# Altium PCB Mickeyboard2.PcbDoc
Units mil, origin at the board's own origin, x right, y up, seen from the top; angles counter-clockwise.
Board outline 7195 x 6185 mil, 2 copper layers (Top Layer, Bottom Layer); 103 components, 146 nets, 1044 pads, 0 vias.
Unrouted connection lines stored in the file: 263.
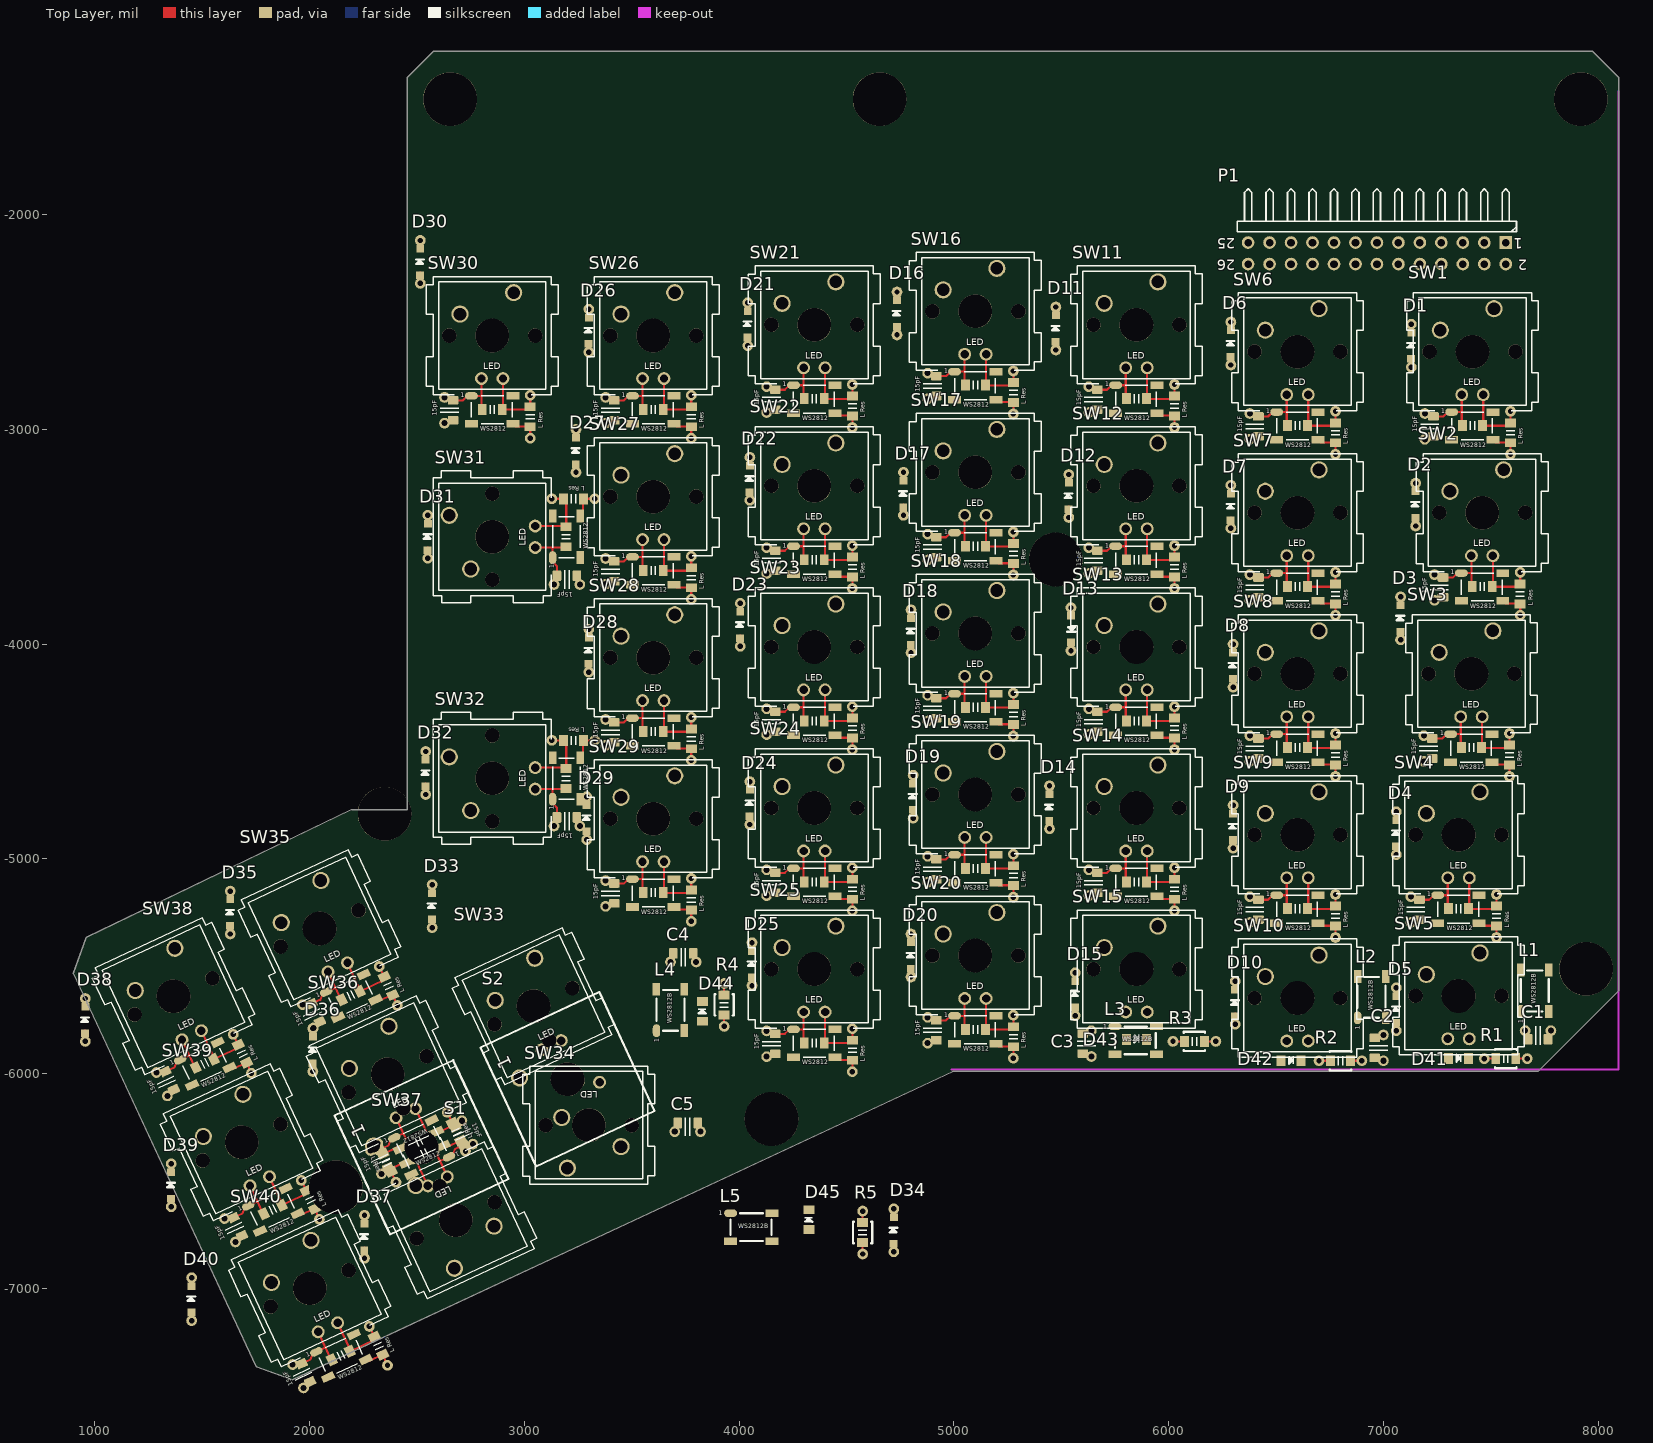
[diagram p0: Top Layer view]
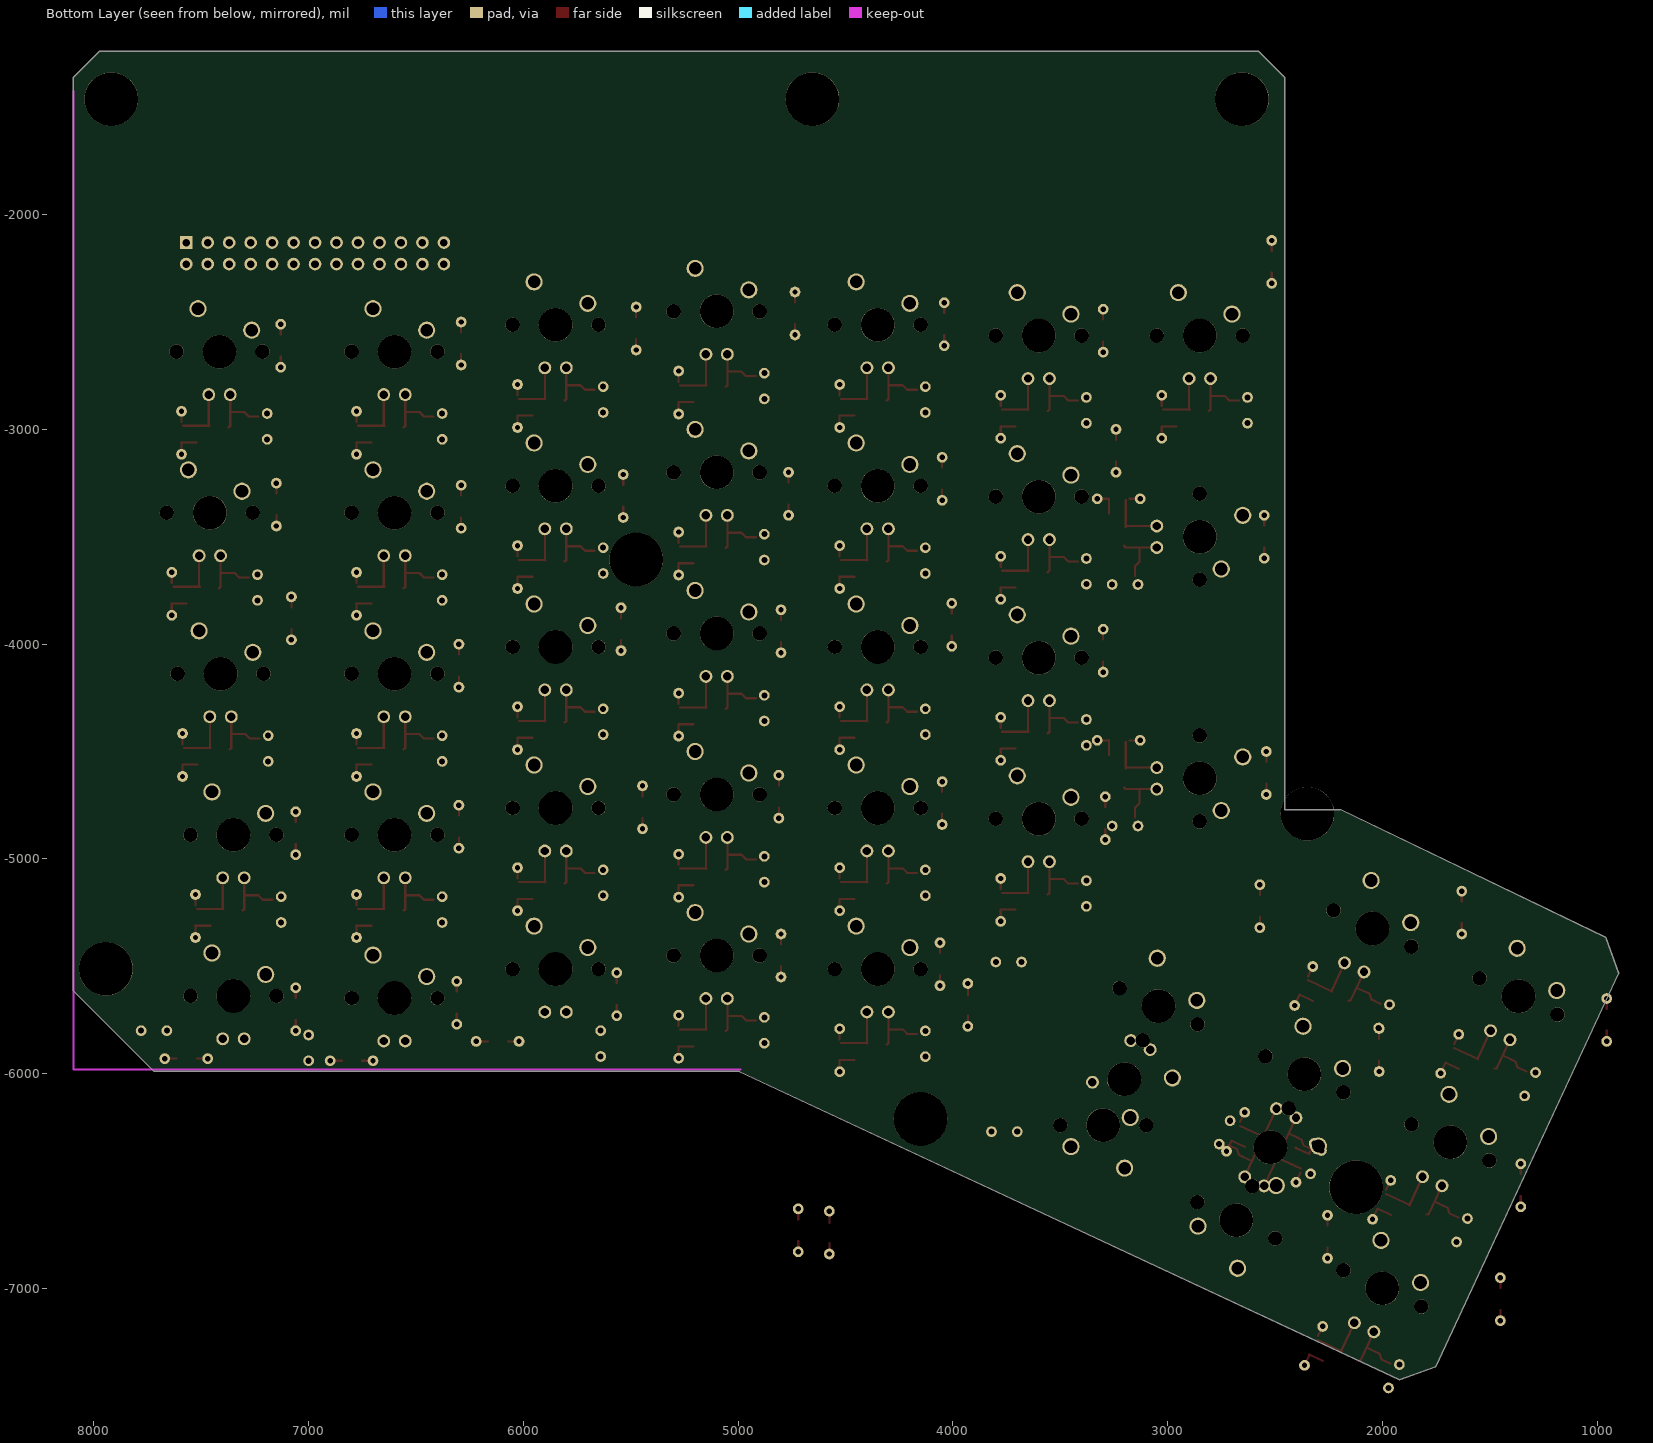
[diagram p1: Bottom Layer view, seen from below]

## Layer stack, top to bottom
Top Solder: solder mask 0.4, Solder Resist, Dk 3.5
Top Layer: signal copper 1.4
Dielectric 1: dielectric 12.6, FR-4, Dk 4.8
Bottom Layer: signal copper 1.4
Bottom Solder: solder mask 0.4, Solder Resist, Dk 3.5

## Board outline
2455,-4650 2455,-4770 2195,-4770 960,-5365 900,-5534.07 1751.52,-7365 1920,-7425 4995,-5990 7720,-5990 8095,-5615 8095,-1360 7975,-1240 2575,-1240 2455,-1360

## Design rules (kind name [scope] priority, off if disabled: settings)
Clearance [All] p1: gap=8
HoleSize [All] p1: absolutevalues=TRUE maxlimit=100 minlimit=15 maxpercent=80.000 minpercent=20.000
PolygonConnect [All] p1: connectstyle=Relief reliefconductorwidth=10 reliefentries=4 polygonreliefangle="90 Angle" airgapwidth=10
RoomDefinition keyboard [InComponentClass('keyboard')] p1: confinementstyle=ConfineIn formatcopy=TRUE lockcomponents=FALSE outline 8815,-3970 18900,-3970 18900,-1695 8815,-1695
RoutingVias [All] p1 off: holewidth=15 width=20 viastyle="Through Hole" minholewidth=12 minwidth=18 maxholewidth=250 maxwidth=250
ShortCircuit ShortCircuit_2 [(InNet('GND') OR InNet('VCC'))] p1: allowed=TRUE
ShortCircuit [InNet('No Net') vs OnLayer('Top Layer')] p2: allowed=TRUE
ShortCircuit ShortCircuit_1 [All] p3: allowed=FALSE
SolderMaskExpansion [All] p1: expansion=4
Width [All] p1: maxlimit=20 minlimit=8 preferedwidth=8
28 further rules are at their usual default settings.

## Components (designator, comment, footprint, x,y, rotation, side; value= is the part's Value field where it differs from the comment)
C1 "Cap" AxialSMDCap 7780,-5800 r180 top
C2 "Cap" AxialSMDCap 7000,-5940 r90 top
C3 "Cap" AxialSMDCap 5640,-5920 r90 top
C4 "Cap" AxialSMDCap 3680,-5480 r0 top
C5 "Cap" AxialSMDCap 3700,-6270 r0 top
D1 "Diode" AxialSMDDiode 7130,-2710 r90 top
D2 "Diode" AxialSMDDiode 7150,-3450 r90 top
D3 "Diode" AxialSMDDiode 7080,-3980 r90 top
D4 "Diode" AxialSMDDiode 7060,-4980 r90 top
D5 "Diode" AxialSMDDiode 7060,-5800 r90 top
D6 "Diode" AxialSMDDiode 6290,-2700 r90 top
D7 "Diode" AxialSMDDiode 6290,-3460 r90 top
D8 "Diode" AxialSMDDiode 6300,-4200 r90 top
D9 "Diode" AxialSMDDiode 6300,-4950 r90 top
D10 "Diode" AxialSMDDiode 6310,-5770 r90 top
D11 "Diode" AxialSMDDiode 5475,-2630 r90 top
D12 "Diode" AxialSMDDiode 5535,-3410 r90 top
D13 "Diode" AxialSMDDiode 5545,-3830 r270 top
D14 "Diode" AxialSMDDiode 5445,-4860 r90 top
D15 "Diode" AxialSMDDiode 5565,-5730 r90 top
D16 "Diode" AxialSMDDiode 4735,-2560 r90 top
D17 "Diode" AxialSMDDiode 4765,-3400 r90 top
D18 "Diode" AxialSMDDiode 4800,-4040 r90 top
D19 "Diode" AxialSMDDiode 4810,-4810 r90 top
D20 "Diode" AxialSMDDiode 4800,-5550 r90 top
D21 "Diode" AxialSMDDiode 4040,-2610 r90 top
D22 "Diode" AxialSMDDiode 4050,-3330 r90 top
D23 "Diode" AxialSMDDiode 4005,-4010 r90 top
D24 "Diode" AxialSMDDiode 4050,-4840 r90 top
D25 "Diode" AxialSMDDiode 4060,-5590 r90 top
D26 "Diode" AxialSMDDiode 3300,-2640 r90 top
D27 "Diode" AxialSMDDiode 3240,-3200 r90 top
D28 "Diode" AxialSMDDiode 3300,-4130 r90 top
D29 "Diode" AxialSMDDiode 3290,-4910 r90 top
D30 "Diode" AxialSMDDiode 2515,-2320 r90 top
D31 "Diode" AxialSMDDiode 2550,-3600 r90 top
D32 "Diode" AxialSMDDiode 2540,-4700 r90 top
D33 "Diode" AxialSMDDiode 2570,-5320 r90 top
D34 "Diode" AxialSMDDiode 4720,-6830 r90 top
D35 "Diode" AxialSMDDiode 1630,-5350 r90 top
D36 "Diode" AxialSMDDiode 2015,-5990 r90 top
D37 "Diode" AxialSMDDiode 2255,-6860 r90 top
D38 "Diode" AxialSMDDiode 955,-5850 r90 top
D39 "Diode" AxialSMDDiode 1355,-6620 r90 top
D40 "Diode" AxialSMDDiode 1450,-7150 r90 top
D41 "LED2" 0805_LED 7350,-5930 r0 top
D42 "LED2" 0805_LED 6570,-5940 r0 top
D43 "LED2" 0805_LED 5850,-5840 r0 top
D44 "LED2" 0805_LED 3830,-5710 r90 top
D45 "LED2" 0805_LED 4325,-6680 r90 top
L1 "WS2812B" WS2812 7640,-5710 r90 top
L2 "WS2812B" WS2812 6880,-5740 r90 top
L3 "WS2812B" WS2812 5750,-5780 r0 top
L4 "WS2812B" WS2812 3615,-5800 r90 top
L5 "WS2812B" WS2812 3960,-6650 r0 top
P1 "Header 13X2H" HDR2X13H 7570,-2130 r180 top
R1 "Res1" AxialSMDResistor 7470,-5930 r0 top
R2 "Res1" AxialSMDResistor 6700,-5940 r0 top
R3 "Res1" AxialSMDResistor 6020,-5850 r0 top
R4 "Res1" AxialSMDResistor 3930,-5780 r90 top
R5 "Res1" AxialSMDResistor 4575,-6840 r90 top
S1 "SW-SPST" CHERRYMXSWITCHNOLED 2521,-6343 r115 top
S2 "SW-SPST" CHERRYMXSWITCHNOLED 3201,-6026 r115 top
SW1 "CherrySwitch_WS" CHERRYMXSWITCHLED_WS2812 7415,-2638 r0 top
SW2 "CherrySwitch_WS" CHERRYMXSWITCHLED_WS2812 7460,-3388 r0 top
SW3 "CherrySwitch_WS" CHERRYMXSWITCHLED_WS2812 7410,-4138 r0 top
SW4 "CherrySwitch_WS" CHERRYMXSWITCHLED_WS2812 7350,-4888 r0 top
SW5 "CherrySwitch_1" CherryMxSwitchNOSMD 7350,-5638 r0 top
SW6 "CherrySwitch_WS" CHERRYMXSWITCHLED_WS2812 6600,-2638 r0 top
SW7 "CherrySwitch_WS" CHERRYMXSWITCHLED_WS2812 6600,-3388 r0 top
SW8 "CherrySwitch_WS" CHERRYMXSWITCHLED_WS2812 6600,-4138 r0 top
SW9 "CherrySwitch_WS" CHERRYMXSWITCHLED_WS2812 6600,-4888 r0 top
SW10 "CherrySwitch_1" CherryMxSwitchNOSMD 6600,-5648 r0 top
SW11 "CherrySwitch_WS" CHERRYMXSWITCHLED_WS2812 5850,-2513 r0 top
SW12 "CherrySwitch_WS" CHERRYMXSWITCHLED_WS2812 5850,-3263 r0 top
SW13 "CherrySwitch_WS" CHERRYMXSWITCHLED_WS2812 5850,-4013 r0 top
SW14 "CherrySwitch_WS" CherryMxSwitchLED_WS2812 5850,-4763 r0 top
SW15 "CherrySwitch_1" CherryMxSwitchNOSMD 5850,-5513 r0 top
SW16 "CherrySwitch_WS" CHERRYMXSWITCHLED_WS2812 5100,-2450 r0 top
SW17 "CherrySwitch_WS" CHERRYMXSWITCHLED_WS2812 5100,-3200 r0 top
SW18 "CherrySwitch_WS" CHERRYMXSWITCHLED_WS2812 5100,-3950 r0 top
SW19 "CherrySwitch_WS" CHERRYMXSWITCHLED_WS2812 5100,-4700 r0 top
SW20 "CherrySwitch_WS" CHERRYMXSWITCHLED_WS2812 5100,-5450 r0 top
SW21 "CherrySwitch_WS" CHERRYMXSWITCHLED_WS2812 4350,-2513 r0 top
SW22 "CherrySwitch_WS" CHERRYMXSWITCHLED_WS2812 4350,-3263 r0 top
SW23 "CherrySwitch_WS" CHERRYMXSWITCHLED_WS2812 4350,-4013 r0 top
SW24 "CherrySwitch_WS" CHERRYMXSWITCHLED_WS2812 4350,-4763 r0 top
SW25 "CherrySwitch_WS" CHERRYMXSWITCHLED_WS2812 4350,-5513 r0 top
SW26 "CherrySwitch_WS" CHERRYMXSWITCHLED_WS2812 3600,-2563 r0 top
SW27 "CherrySwitch_WS" CHERRYMXSWITCHLED_WS2812 3600,-3313 r0 top
SW28 "CherrySwitch_WS" CHERRYMXSWITCHLED_WS2812 3600,-4063 r0 top
SW29 "CherrySwitch_WS" CHERRYMXSWITCHLED_WS2812 3600,-4813 r0 top
SW30 "CherrySwitch_WS" CHERRYMXSWITCHLED_WS2812 2850,-2563 r0 top
SW31 "CherrySwitch_WS" CHERRYMXSWITCHLED_WS2812 2850,-3500 r90 top
SW32 "CherrySwitch_WS" CHERRYMXSWITCHLED_WS2812 2850,-4625 r90 top
SW33 "CherrySwitch_1" CherryMxSwitchNOSMD 3042,-5686 r25 top
SW34 "CherrySwitch_1" CherryMxSwitchNOSMD 3300,-6240 r180 top
SW35 "CherrySwitch_WS" CHERRYMXSWITCHLED_WS2812 2046,-5324 r25 top
SW36 "CherrySwitch_WS" CHERRYMXSWITCHLED_WS2812 2363,-6003 r25 top
SW37 "CherrySwitch_WS" CHERRYMXSWITCHLED_WS2812 2680,-6683 r205 top
SW38 "CherrySwitch_WS" CHERRYMXSWITCHLED_WS2812 1366,-5640 r25 top
SW39 "CherrySwitch_WS" CHERRYMXSWITCHLED_WS2812 1683,-6320 r25 top
SW40 "CherrySwitch_WS" CHERRYMXSWITCHLED_WS2812 2000,-7000 r25 top

## Footprints (in the part's own frame and the unit in brackets; to place one, negate y for a bottom-side part, rotate by r counter-clockwise, add the part's x,y. Pads: shape width x height; smd on the part's side, far side on the other; paste and mask are expansions set on the pad)
0805_LED [mil] "SMD LED"
  rect 41x51 smd: 1(-46.5,0) 2(46.5,0)
  silkscreen extent -10,-15 10,20
AxialSMDCap [mil]
  round 50 hole 28: 1(0,0) 2(120,0)
  rrect25% 40x50 smd: ""(13.5,40) ""(106.5,40)
  silkscreen extent 50,-20 70,65
AxialSMDDiode [mil]
  round 50 hole 25: 1(0,0) 2(200,0)
  rect 35x37 smd: 3(38,1) 4(161,0)
  Top Layer lines w10: 0,0 50,0 ; 152,0 200,0
  silkscreen extent 91,-17 112,20
AxialSMDResistor [mil]
  round 50 hole 25: 1(0,0) 2(200,0)
  rect 41x51 smd: ""(53.5,0) ""(146.5,0)
  Top Layer lines w10: 0,0 50,0 ; 145,0 200,0
  silkscreen extent 50,-45 150,45
CHERRYMXSWITCHLED_WS2812 [mil] "Cherry Mx Switch  With an LED and WS2812 footprint"
  round 80 hole 59: 1(100,200) 2(-150,100)
  round 60 hole 39: 3(-50,-200) 13(50,-200)
  rect 60x35 smd: 4(96,-281) 5(-97,-411) 18(96,-411)
  round 50 hole 28: 6(-222,-408) 9(-222,-288)
  round 50 hole 25: 7(177,-478) 16(177,-278)
  rrect25% 50x40 smd: 8(-182,-394.5) 10(-182,-301.5)
  oval 60x35 smd: 11(-97,-281)
  rect 41x51 smd: 12(-46.5,-344) 14(46.5,-344)
  rect 51x41 smd: 15(177,-331.5) 17(177,-424.5)
  round 67 hole 67: ""(-200,0) ""(200,0)
  round 157 hole 157 unplated: ""(0,0)
  Top Layer lines w10: -182,-302 -137,-302 -116,-281 -97,-281 ; -96,-281 -51,-281 ; -50,-347 -50,-200 ; -50,-344 -42,-352 ; 47,-345 170,-345 ; 50,-346 50,-200 ; 108,-423 178,-423 ; 177,-478 177,-423 ; 177,-328 177,-278
  silkscreen extent -307,-411 307,275
CherryMxSwitchLED_WS2812 [mil] "Cherry Mx Switch  With an LED and WS2812 footprint"
  round 80 hole 59: 1(100,200) 2(-150,100)
  round 60 hole 39: 3(-50,-200) 13(50,-200)
  rect 60x35 smd: 4(96,-281) 5(-97,-411) 18(96,-411)
  round 50 hole 28: 6(-222,-408) 9(-222,-288)
  round 50 hole 25: 7(177,-478) 16(177,-278)
  rrect25% 50x40 smd: 8(-182,-394.5) 10(-182,-301.5)
  oval 60x35 smd: 11(-97,-281)
  rect 41x51 smd: 12(-46.5,-344) 14(46.5,-344)
  rect 51x41 smd: 15(177,-331.5) 17(177,-424.5)
  round 67 hole 67: ""(-200,0) ""(200,0)
  round 157 hole 157 unplated: ""(0,0)
  Top Layer lines w10: -182,-302 -137,-302 -116,-281 -97,-281 ; -96,-281 -51,-281 ; -50,-347 -50,-200 ; -50,-344 -42,-352 ; 47,-345 170,-345 ; 50,-346 50,-200 ; 108,-423 178,-423 ; 177,-478 177,-423 ; 177,-328 177,-278
  silkscreen extent -307,-411 307,275
CHERRYMXSWITCHNOLED [mil] "Cherry Mx Switch  NO LED"
  round 80 hole 59: 1(100,200) 2(-150,100)
  round 67 hole 67: ""(-200,0) ""(200,0)
  round 157 hole 157 unplated: ""(0,0)
  silkscreen extent -305,-305 305,305
CherryMxSwitchNOSMD [mil] "Cherry Mx Switch  With out smd led"
  round 80 hole 59: 1(100,200) 2(-150,100)
  round 60 hole 39: 3(-50,-200) 4(50,-200)
  round 67 hole 67: ""(-200,0) ""(200,0)
  round 157 hole 157 unplated: ""(0,0)
  silkscreen extent -307,-275 307,275
HDR2X13H [mm] "Connector; Header; 13x2 Position; Right Angle"
  rect 1.5x1.5 hole 0.9: 1(0,0)
  round 1.5 hole 0.9: 2(0,2.54) 3(2.54,0) 4(2.54,2.54) 5(5.08,0) 6(5.08,2.54) 7(7.62,0) 8(7.62,2.54) 9(10.16,0) 10(10.16,2.54) 11(12.7,0) 12(12.7,2.54) 13(15.24,0) 14(15.24,2.54) 15(17.78,0) 16(17.78,2.54) 17(20.32,0) 18(20.32,2.54) 19(22.86,0) 20(22.86,2.54) 21(25.4,0) 22(25.4,2.54) 23(27.94,0) 24(27.94,2.54) 25(30.48,0) 26(30.48,2.54)
  silkscreen extent -1.27,-6.35 31.75,-1.27
WS2812 [mil]
  oval 60x35 smd: 1(0,0)
  rect 60x35 smd: 2(0,-130) 3(193,-130) 4(193,0)
  silkscreen extent 0,-130 190,0

## Part data
C1 C2 C3 C4 C5: "Capacitor"
D41 D42 D43 D44 D45: "Typical RED, GREEN, YELLOW, AMBER GaAs LED"
P1: "Header, 13-Pin, Dual row, Right Angle"
R1 R2 R3 R4 R5: "Resistor"
S1 S2: "Single-Pole, Single-Throw Switch"
SW1 SW2 SW3 SW4 SW6 SW7 SW8 SW9 SW11 SW12 SW13 SW14 SW16 SW17 SW18 SW19 SW20 SW21 SW22 SW23 SW24 SW25 SW26 SW27 SW28 SW29 SW30 SW31 SW32 SW35 SW36 SW37 SW38 SW39 SW40: "Cherry MX Switch layout With WS2812, LED, Cap, and Res"
SW5 SW10 SW15 SW33 SW34: "Cherry MX Switch With Through hole LED"

## Free pads (board coordinates)
  round 250 hole 250: ""(2122,-6529) ""(2349,-4790) ""(2654,-1462) ""(4151,-6211) ""(4654,-1462) ""(5474,-3606) ""(7919,-1462) ""(7944,-5512)

## Nets (pads, with @x,y where several pads share a name; then routed paths per layer and width w, separated by ;. In a path a pad name is that pad's centre, name@x,y a point inside that pad or via, vN(x,y) a via of type N, cw(c..) or ccw(c..) an arc to the next point about the centre after c; other vN are vias at no path point)
6: SW2.8 SW3.8 SW4.8 SW6.8 SW7.8 SW8.8 SW9.8 SW11.8 SW12.8 SW13.8 SW14.8 SW16.8 SW17.8 SW18.8 SW19.8 SW20.8 SW21.8 SW22.8 SW23.8 SW24.8 SW25.8 SW26.8 SW27.8 SW28.8 SW29.8 SW30.8 SW31.8 SW32.8 SW35.8 SW36.8 SW37.8 SW38.8 SW39.8 SW40.8
COLUMN0: D1.2 D1.4 D2.2 D2.4 D3.2 D3.4 D4.2 D4.4 D5.2 D5.4 D6.2 D6.4 D7.2 D7.4 P1.6
COLUMN1: D8.2 D8.4 D9.2 D9.4 D10.2 D10.4 D11.2 D11.4 D12.2 D12.4 D13.2 D13.4 D14.2 D14.4 P1.8
COLUMN2: D15.2 D15.4 D16.2 D16.4 D17.2 D17.4 D18.2 D18.4 D19.2 D19.4 D20.2 D20.4 D21.2 D21.4 P1.10
COLUMN3: D22.2 D22.4 D23.2 D23.4 D24.2 D24.4 D25.2 D25.4 D26.2 D26.4 D27.2 D27.4 D28.2 D28.4 P1.12
COLUMN4: D29.2 D29.4 D30.2 D30.4 D31.2 D31.4 D32.2 D32.4 D33.2 D33.4 D34.2 D34.4 D35.2 D35.4 P1.14 S2.2
COLUMN5: D36.2 D36.4 D37.2 D37.4 D38.2 D38.4 D39.2 D39.4 D40.2 D40.4 P1.16 S1.2
COLUMN6: P1.18
COLUMN7: P1.20
COLUMN8: P1.22
COLUMN9: P1.24
COLUMN10: P1.26
DIN: P1.3 SW1.4
DOUT: P1.4 SW40.5
GND: C1.1 C2.1 C3.1 C4.1 C5.1 L1.4 L2.4 L3.4 L4.4 L5.4 P1.2 R1.2 R2.2 R3.2 R4.2 R5.2 SW1.6 SW1.7 SW1.17 SW1.18 SW2.6 SW2.7 SW2.17 SW2.18 SW3.6 SW3.7 SW3.17 SW3.18 SW4.6 SW4.7 SW4.17 SW4.18 SW6.6 SW6.7 SW6.17 SW6.18 SW7.6 SW7.7 SW7.17 SW7.18 SW8.6 SW8.7 SW8.17 SW8.18 SW9.6 SW9.7 SW9.17 SW9.18 SW11.6 SW11.7 SW11.17 SW11.18 SW12.6 SW12.7 SW12.17 SW12.18 SW13.6 SW13.7 SW13.17 SW13.18 SW14.6 SW14.7 SW14.17 SW14.18 SW16.6 SW16.7 SW16.17 SW16.18 SW17.6 SW17.7 SW17.17 SW17.18 SW18.6 SW18.7 SW18.17 SW18.18 SW19.6 SW19.7 SW19.17 SW19.18 SW20.6 SW20.7 SW20.17 SW20.18 SW21.6 SW21.7 SW21.17 SW21.18 SW22.6 SW22.7 SW22.17 SW22.18 SW23.6 SW23.7 SW23.17 SW23.18 SW24.6 SW24.7 SW24.17 SW24.18 SW25.6 SW25.7 SW25.17 SW25.18 SW26.6 SW26.7 SW26.17 SW26.18 SW27.6 SW27.7 SW27.17 SW27.18 SW28.6 SW28.7 SW28.17 SW28.18 SW29.6 SW29.7 SW29.17 SW29.18 SW30.6 SW30.7 SW30.17 SW30.18 SW31.6 SW31.7 SW31.17 SW31.18 SW32.6 SW32.7 SW32.17 SW32.18 SW35.6 SW35.7 SW35.17 SW35.18 SW36.6 SW36.7 SW36.17 SW36.18 SW37.6 SW37.7 SW37.17 SW37.18 SW38.6 SW38.7 SW38.17 SW38.18 SW39.6 SW39.7 SW39.17 SW39.18 SW40.6 SW40.7 SW40.17 SW40.18
NetD1_1: D1.1 D1.3 SW1.2
NetD2_1: D2.1 D2.3 SW2.2
NetD3_1: D3.1 D3.3 SW3.2
NetD4_1: D4.1 D4.3 SW4.2
NetD5_1: D5.1 D5.3 SW5.2
NetD6_1: D6.1 D6.3 SW6.2
NetD7_1: D7.1 D7.3 SW7.2
NetD8_1: D8.1 D8.3 SW8.2
NetD9_1: D9.1 D9.3 SW9.2
NetD10_1: D10.1 D10.3 SW10.2
NetD11_1: D11.1 D11.3 SW11.2
NetD12_1: D12.1 D12.3 SW12.2
NetD13_1: D13.1 D13.3 SW13.2
NetD14_1: D14.1 D14.3 SW14.2
NetD15_1: D15.1 D15.3 SW15.2
NetD16_1: D16.1 D16.3 SW16.2
NetD17_1: D17.1 D17.3 SW17.2
NetD18_1: D18.1 D18.3 SW18.2
NetD19_1: D19.1 D19.3 SW19.2
NetD20_1: D20.1 D20.3 SW20.2
NetD21_1: D21.1 D21.3 SW21.2
NetD22_1: D22.1 D22.3 SW22.2
NetD23_1: D23.1 D23.3 SW23.2
NetD24_1: D24.1 D24.3 SW24.2
NetD25_1: D25.1 D25.3 SW25.2
NetD26_1: D26.1 D26.3 SW26.2
NetD27_1: D27.1 D27.3 SW27.2
NetD28_1: D28.1 D28.3 SW28.2
NetD29_1: D29.1 D29.3 SW29.2
NetD30_1: D30.1 D30.3 SW30.2
NetD31_1: D31.1 D31.3 SW31.2
NetD32_1: D32.1 D32.3 SW32.2
NetD33_1: D33.1 D33.3 SW33.2
NetD34_1: D34.1 D34.3 SW34.2
NetD35_1: D35.1 D35.3 SW35.2
NetD36_1: D36.1 D36.3 SW36.2
NetD37_1: D37.1 D37.3 SW37.2
NetD38_1: D38.1 D38.3 SW38.2
NetD39_1: D39.1 D39.3 SW39.2
NetD40_1: D40.1 D40.3 SW40.2
NetD41_2: D41.2 R1.1 SW5.4
NetD42_2: D42.2 R2.1 SW10.4
NetD43_2: D43.2 R3.1 SW15.4
NetD44_2: D44.2 R4.1 SW33.4
NetD45_2: D45.2 R5.1 SW34.4
NetSW1_5: SW1.5 SW2.4
NetSW1_13: SW1.13 SW1.14 SW1.15 SW1.16
NetSW2_5: SW2.5 SW3.4
NetSW2_13: SW2.13 SW2.14 SW2.15 SW2.16
NetSW3_5: SW3.5 SW4.4
NetSW3_13: SW3.13 SW3.14 SW3.15 SW3.16
NetSW4_13: SW4.13 SW4.14 SW4.15 SW4.16
NetSW6_5: SW6.5 SW7.4
NetSW6_13: SW6.13 SW6.14 SW6.15 SW6.16
NetSW7_5: SW7.5 SW8.4
NetSW7_13: SW7.13 SW7.14 SW7.15 SW7.16
NetSW8_5: SW8.5 SW9.4
NetSW8_13: SW8.13 SW8.14 SW8.15 SW8.16
NetSW9_13: SW9.13 SW9.14 SW9.15 SW9.16
NetSW11_5: SW11.5 SW12.4
NetSW11_13: SW11.13 SW11.14 SW11.15 SW11.16
NetSW12_5: SW12.5 SW13.4
NetSW12_13: SW12.13 SW12.14 SW12.15 SW12.16
NetSW13_5: SW13.5 SW14.4
NetSW13_13: SW13.13 SW13.14 SW13.15 SW13.16
NetSW14_13: SW14.13 SW14.14 SW14.15 SW14.16
NetSW16_5: SW16.5 SW17.4
NetSW16_13: SW16.13 SW16.14 SW16.15 SW16.16
NetSW17_5: SW17.5 SW18.4
NetSW17_13: SW17.13 SW17.14 SW17.15 SW17.16
NetSW18_5: SW18.5 SW19.4
NetSW18_13: SW18.13 SW18.14 SW18.15 SW18.16
NetSW19_5: SW19.5 SW20.4
NetSW19_13: SW19.13 SW19.14 SW19.15 SW19.16
NetSW20_5: SW20.5 SW21.4
NetSW20_13: SW20.13 SW20.14 SW20.15 SW20.16
NetSW21_5: SW21.5 SW22.4
NetSW21_13: SW21.13 SW21.14 SW21.15 SW21.16
NetSW22_5: SW22.5 SW23.4
NetSW22_13: SW22.13 SW22.14 SW22.15 SW22.16
NetSW23_5: SW23.5 SW24.4
NetSW23_13: SW23.13 SW23.14 SW23.15 SW23.16
NetSW24_5: SW24.5 SW25.4
NetSW24_13: SW24.13 SW24.14 SW24.15 SW24.16
NetSW25_5: SW25.5 SW26.4
NetSW25_13: SW25.13 SW25.14 SW25.15 SW25.16
NetSW26_5: SW26.5 SW27.4
NetSW26_13: SW26.13 SW26.14 SW26.15 SW26.16
NetSW27_5: SW27.5 SW28.4
NetSW27_13: SW27.13 SW27.14 SW27.15 SW27.16
NetSW28_5: SW28.5 SW29.4
NetSW28_13: SW28.13 SW28.14 SW28.15 SW28.16
NetSW29_5: SW29.5 SW30.4
NetSW29_13: SW29.13 SW29.14 SW29.15 SW29.16
NetSW30_5: SW30.5 SW31.4
NetSW30_13: SW30.13 SW30.14 SW30.15 SW30.16
NetSW31_5: SW31.5 SW32.4
NetSW31_13: SW31.13 SW31.14 SW31.15 SW31.16
NetSW32_13: SW32.13 SW32.14 SW32.15 SW32.16
NetSW35_5: SW35.5 SW36.4
NetSW35_13: SW35.13 SW35.14 SW35.15 SW35.16
NetSW36_5: SW36.5 SW37.4
NetSW36_13: SW36.13 SW36.14 SW36.15 SW36.16
NetSW37_5: SW37.5 SW38.4
NetSW37_13: SW37.13 SW37.14 SW37.15 SW37.16
NetSW38_5: SW38.5 SW39.4
NetSW38_13: SW38.13 SW38.14 SW38.15 SW38.16
NetSW39_5: SW39.5 SW40.4
NetSW39_13: SW39.13 SW39.14 SW39.15 SW39.16
NetSW40_13: SW40.13 SW40.14 SW40.15 SW40.16
ROW0: P1.5 S1.1 SW1.1 SW8.1 SW15.1 SW22.1 SW29.1 SW36.1
ROW1: P1.7 SW2.1 SW9.1 SW16.1 SW23.1 SW30.1 SW37.1
ROW2: P1.9 SW3.1 SW10.1 SW17.1 SW24.1 SW31.1 SW38.1
ROW3: P1.11 SW4.1 SW11.1 SW18.1 SW25.1 SW32.1 SW39.1
ROW4: P1.13 S2.1 SW5.1 SW12.1 SW19.1 SW26.1 SW33.1 SW40.1
ROW5: P1.15 SW6.1 SW13.1 SW20.1 SW27.1 SW34.1
ROW6: P1.17 SW7.1 SW14.1 SW21.1 SW28.1 SW35.1
ROW7: P1.19
ROW8: P1.21
ROW9: P1.23
ROW10: P1.25
SW4OUT_SW5IN: L1.3 SW4.5
SW5OUT_SW6IN: L1.2 SW6.4
SW9OUT_SW10IN: L2.3 SW9.5
SW10OUT_SW11IN: L2.2 SW11.4
SW14OUT_SW15IN: L3.3 SW14.5
SW15OUT_SW16IN: L3.2 SW16.4
SW32OUT_SW33IN: L4.3 SW32.5
SW33OUT_SW34IN: L4.2 L5.3
SW34OUT_SW35IN: L5.2 SW35.4
VCC: C1.2 C2.2 C3.2 C4.2 C5.2 D41.1 D42.1 D43.1 D44.1 D45.1 L1.1 L2.1 L3.1 L4.1 L5.1 P1.1 SW1.3 SW1.9 SW1.10 SW1.11 SW1.12 SW2.3 SW2.9 SW2.10 SW2.11 SW2.12 SW3.3 SW3.9 SW3.10 SW3.11 SW3.12 SW4.3 SW4.9 SW4.10 SW4.11 SW4.12 SW5.3 SW6.3 SW6.9 SW6.10 SW6.11 SW6.12 SW7.3 SW7.9 SW7.10 SW7.11 SW7.12 SW8.3 SW8.9 SW8.10 SW8.11 SW8.12 SW9.3 SW9.9 SW9.10 SW9.11 SW9.12 SW10.3 SW11.3 SW11.9 SW11.10 SW11.11 SW11.12 SW12.3 SW12.9 SW12.10 SW12.11 SW12.12 SW13.3 SW13.9 SW13.10 SW13.11 SW13.12 SW14.3 SW14.9 SW14.10 SW14.11 SW14.12 SW15.3 SW16.3 SW16.9 SW16.10 SW16.11 SW16.12 SW17.3 SW17.9 SW17.10 SW17.11 SW17.12 SW18.3 SW18.9 SW18.10 SW18.11 SW18.12 SW19.3 SW19.9 SW19.10 SW19.11 SW19.12 SW20.3 SW20.9 SW20.10 SW20.11 SW20.12 SW21.3 SW21.9 SW21.10 SW21.11 SW21.12 SW22.3 SW22.9 SW22.10 SW22.11 SW22.12 SW23.3 SW23.9 SW23.10 SW23.11 SW23.12 SW24.3 SW24.9 SW24.10 SW24.11 SW24.12 SW25.3 SW25.9 SW25.10 SW25.11 SW25.12 SW26.3 SW26.9 SW26.10 SW26.11 SW26.12 SW27.3 SW27.9 SW27.10 SW27.11 SW27.12 SW28.3 SW28.9 SW28.10 SW28.11 SW28.12 SW29.3 SW29.9 SW29.10 SW29.11 SW29.12 SW30.3 SW30.9 SW30.10 SW30.11 SW30.12 SW31.3 SW31.9 SW31.10 SW31.11 SW31.12 SW32.3 SW32.9 SW32.10 SW32.11 SW32.12 SW33.3 SW34.3 SW35.3 SW35.9 SW35.10 SW35.11 SW35.12 SW36.3 SW36.9 SW36.10 SW36.11 SW36.12 SW37.3 SW37.9 SW37.10 SW37.11 SW37.12 SW38.3 SW38.9 SW38.10 SW38.11 SW38.12 SW39.3 SW39.9 SW39.10 SW39.11 SW39.12 SW40.3 SW40.9 SW40.10 SW40.11 SW40.12
pads on no net: C1. C2. C3. C4. C5. R1. R2. R3. R4. R5. S1. S2. SW1. SW1.8 SW2. SW3. SW4. SW5. SW6. SW7. SW8. SW9. SW10. SW11. SW12. SW13. SW14. SW15. SW16. SW17. SW18. SW19. SW20. SW21. SW22. SW23. SW24. SW25. SW26. SW27. SW28. SW29. SW30. SW31. SW32. SW33. SW34. SW35. SW36. SW37. SW38. SW39. SW40.

## Keep-outs
Keep-Out Layer:
  lines w10: 4990,-5980 8095,-5980 8095,-1425

## Silkscreen, mask and mechanical layers (free items; w line width, h text height)
Mechanical 1:
  lines w10: 861.08,-5583.93 900,-5534.07 ; 866.56,-5628.31 900,-5534.07 ; 890.58,-5530.73 909.42,-5537.42 ; 890.93,-5538.29 909.07,-5529.85 ; 898.78,-5597.31 900,-5534.07 ; 907.17,-5596.91 900,-5534.07 ; 943.44,-5580.04 900,-5534.07 ; 950.58,-5361.65 969.42,-5368.34 ; 961.22,-5301.77 960,-5365 ; 993.44,-5270.76 960,-5365 ; 998.91,-5315.14 960,-5365 ; 1160.92,-6095.11 900,-5534.07 ; 1490.59,-6803.96 1751.52,-7365 ; 1657.31,-7331.45 1751.52,-7365 ; 1681.5,-7334.53 1775,-7370 ; 1688.28,-7363.71 1751.52,-7365 ; 1701.7,-7326.03 1751.52,-7365 ; 1708.08,-7319.03 1751.52,-7365 ; 1711.81,-7367.42 1775,-7370 ; 1725.99,-7330.02 1775,-7370 ; 1742.45,-7369.22 1760.58,-7360.78 ; 1744.35,-7302.16 1751.52,-7365 ; 1748.16,-7374.42 1754.87,-7355.58 ; 1771.45,-7379.35 1778.55,-7360.65 ; 1915.77,-7415.94 1924.23,-7434.06 ; 1916.45,-7434.35 1923.55,-7415.65 ; 1916.64,-7434.42 1923.35,-7415.58 ; 1965.91,-7381.5 1920,-7425 ; 1969.01,-7464.98 1920,-7425 ; 1969.81,-7463.97 1920,-7425 ; 1982.83,-7417.75 1920,-7425 ; 1983.19,-7427.58 1920,-7425 ; 1983.23,-7426.29 1920,-7425 ; 2013.5,-7460.47 1920,-7425 ; 2014.2,-7458.55 1920,-7425 ; 3098.76,-6874.91 1920,-7425 ; 3816.24,-6540.09 4995,-5990 ; 4932.17,-5997.25 4995,-5990 ; 4949.09,-6033.5 4995,-5990 ; 4990.77,-5980.94 4999.23,-5999.06 ; 4995,-6000 4995,-5980 ; 5055,-6010 4995,-5990 ; 5055,-5970 4995,-5990 ; 6076.59,-5990 4995,-5990 ; 6638.41,-5990 7720,-5990 ; 7660,-6010 7720,-5990 ; 7660,-5970 7720,-5990 ; 7720,-6000 7720,-5980 ; 8075,-6050 8095,-5990 ; 8075,-5555 8095,-5615 ; 8085,-5990 8105,-5990 ; 8085,-5615 8105,-5615 ; 8095,-6090 8095,-5990 ; 8095,-5515 8095,-5615 ; 8115,-6050 8095,-5990 ; 8115,-5555 8095,-5615
  text "179.403 (mil)" at 948.32,-5828.36 h60 r70.46
  text "2725 (mil)" at 6086.59,-6025.99 h60
  text "375 (mil)" at 8238.96,-6043.42 h60 r90
  text "2019.252 (mil)" at 1132.51,-6119.36 h60 r294.94
  text "3393.354 (mil)" at 3123.04,-6903.3 h60 r25.02
  text "155.081 (mil)" at 1473.04,-7409.43 h60 r339.23
  text "178.849 (mil)" at 1456.91,-7412.9 h60 r340.4
Drill Drawing:
  text ".LEGEND" at 11340,-6055 h60
  text "Drill Drawing." at 11455,-6210 h60

## Dimensions
8095,-1425 to 2455,-1160 on Mechanical 1
1920,-7425 to 8105,-1240 on Mechanical 1

## Text inside footprints (layer, text, board x,y; h text height)
L1: Top Overlay "1" at 7650,-5765 h20 r90
L2: Top Overlay "1" at 6890,-5795 h20 r90
L3: Top Overlay "1" at 5695,-5790 h20
L4: Top Overlay "1" at 3625,-5855 h20 r90
L5: Top Overlay "1" at 3905,-6660 h20
P1: Top Overlay "2" at 7670,-2210 h50 r180; Top Overlay "1" at 7650,-2110 h50 r180; Top Overlay "25" at 6310,-2110 h50 r180; Top Overlay "26" at 6310,-2210 h50 r180
S1: Top Overlay "1" at 2263.36,-6275.56 h60 r115
S2: Top Overlay "1" at 2943.36,-5958.56 h60 r115
SW1: Top Overlay "LED" at 7373,-2795 h30; Top Overlay "1" at 7269,-2925 h20; Top Overlay "WS2812" at 7359,-3082 h20; Top Overlay "15pF" at 7157,-3012 h20 r90; Top Overlay "L Res" at 7650,-3070 h20 r90
SW2: Top Overlay "L Res" at 7695,-3820 h20 r90; Top Overlay "15pF" at 7202,-3762 h20 r90; Top Overlay "WS2812" at 7404,-3832 h20; Top Overlay "1" at 7314,-3675 h20; Top Overlay "LED" at 7418,-3545 h30
SW3: Top Overlay "LED" at 7368,-4295 h30; Top Overlay "1" at 7264,-4425 h20; Top Overlay "WS2812" at 7354,-4582 h20; Top Overlay "15pF" at 7152,-4512 h20 r90; Top Overlay "L Res" at 7645,-4570 h20 r90
SW4: Top Overlay "L Res" at 7585,-5320 h20 r90; Top Overlay "15pF" at 7092,-5262 h20 r90; Top Overlay "WS2812" at 7294,-5332 h20; Top Overlay "1" at 7204,-5175 h20; Top Overlay "LED" at 7308,-5045 h30
SW5: Top Overlay "LED" at 7308,-5795 h30
SW6: Top Overlay "L Res" at 6835,-3070 h20 r90; Top Overlay "15pF" at 6342,-3012 h20 r90; Top Overlay "WS2812" at 6544,-3082 h20; Top Overlay "1" at 6454,-2925 h20; Top Overlay "LED" at 6558,-2795 h30
SW7: Top Overlay "LED" at 6558,-3545 h30; Top Overlay "1" at 6454,-3675 h20; Top Overlay "WS2812" at 6544,-3832 h20; Top Overlay "15pF" at 6342,-3762 h20 r90; Top Overlay "L Res" at 6835,-3820 h20 r90
SW8: Top Overlay "L Res" at 6835,-4570 h20 r90; Top Overlay "15pF" at 6342,-4512 h20 r90; Top Overlay "WS2812" at 6544,-4582 h20; Top Overlay "1" at 6454,-4425 h20; Top Overlay "LED" at 6558,-4295 h30
SW9: Top Overlay "LED" at 6558,-5045 h30; Top Overlay "1" at 6454,-5175 h20; Top Overlay "WS2812" at 6544,-5332 h20; Top Overlay "15pF" at 6342,-5262 h20 r90; Top Overlay "L Res" at 6835,-5320 h20 r90
SW10: Top Overlay "LED" at 6558,-5805 h30
SW11: Top Overlay "LED" at 5808,-2670 h30; Top Overlay "1" at 5704,-2800 h20; Top Overlay "WS2812" at 5794,-2957 h20; Top Overlay "15pF" at 5592,-2887 h20 r90; Top Overlay "L Res" at 6085,-2945 h20 r90
SW12: Top Overlay "L Res" at 6085,-3695 h20 r90; Top Overlay "15pF" at 5592,-3637 h20 r90; Top Overlay "WS2812" at 5794,-3707 h20; Top Overlay "1" at 5704,-3550 h20; Top Overlay "LED" at 5808,-3420 h30
SW13: Top Overlay "LED" at 5808,-4170 h30; Top Overlay "1" at 5704,-4300 h20; Top Overlay "WS2812" at 5794,-4457 h20; Top Overlay "15pF" at 5592,-4387 h20 r90; Top Overlay "L Res" at 6085,-4445 h20 r90
SW14: Top Overlay "L Res" at 6085,-5195 h20 r90; Top Overlay "15pF" at 5592,-5137 h20 r90; Top Overlay "WS2812" at 5794,-5207 h20; Top Overlay "1" at 5704,-5050 h20; Top Overlay "LED" at 5808,-4920 h30
SW15: Top Overlay "LED" at 5808,-5670 h30
SW16: Top Overlay "L Res" at 5335,-2882 h20 r90; Top Overlay "15pF" at 4842,-2824 h20 r90; Top Overlay "WS2812" at 5044,-2894 h20; Top Overlay "1" at 4954,-2737 h20; Top Overlay "LED" at 5058,-2607 h30
SW17: Top Overlay "LED" at 5058,-3357 h30; Top Overlay "1" at 4954,-3487 h20; Top Overlay "WS2812" at 5044,-3644 h20; Top Overlay "15pF" at 4842,-3574 h20 r90; Top Overlay "L Res" at 5335,-3632 h20 r90
SW18: Top Overlay "L Res" at 5335,-4382 h20 r90; Top Overlay "15pF" at 4842,-4324 h20 r90; Top Overlay "WS2812" at 5044,-4394 h20; Top Overlay "1" at 4954,-4237 h20; Top Overlay "LED" at 5058,-4107 h30
SW19: Top Overlay "LED" at 5058,-4857 h30; Top Overlay "1" at 4954,-4987 h20; Top Overlay "WS2812" at 5044,-5144 h20; Top Overlay "15pF" at 4842,-5074 h20 r90; Top Overlay "L Res" at 5335,-5132 h20 r90
SW20: Top Overlay "L Res" at 5335,-5882 h20 r90; Top Overlay "15pF" at 4842,-5824 h20 r90; Top Overlay "WS2812" at 5044,-5894 h20; Top Overlay "1" at 4954,-5737 h20; Top Overlay "LED" at 5058,-5607 h30
SW21: Top Overlay "LED" at 4308,-2670 h30; Top Overlay "1" at 4204,-2800 h20; Top Overlay "WS2812" at 4294,-2957 h20; Top Overlay "15pF" at 4092,-2887 h20 r90; Top Overlay "L Res" at 4585,-2945 h20 r90
SW22: Top Overlay "L Res" at 4585,-3695 h20 r90; Top Overlay "15pF" at 4092,-3637 h20 r90; Top Overlay "WS2812" at 4294,-3707 h20; Top Overlay "1" at 4204,-3550 h20; Top Overlay "LED" at 4308,-3420 h30
SW23: Top Overlay "LED" at 4308,-4170 h30; Top Overlay "1" at 4204,-4300 h20; Top Overlay "WS2812" at 4294,-4457 h20; Top Overlay "15pF" at 4092,-4387 h20 r90; Top Overlay "L Res" at 4585,-4445 h20 r90
SW24: Top Overlay "L Res" at 4585,-5195 h20 r90; Top Overlay "15pF" at 4092,-5137 h20 r90; Top Overlay "WS2812" at 4294,-5207 h20; Top Overlay "1" at 4204,-5050 h20; Top Overlay "LED" at 4308,-4920 h30
SW25: Top Overlay "LED" at 4308,-5670 h30; Top Overlay "1" at 4204,-5800 h20; Top Overlay "WS2812" at 4294,-5957 h20; Top Overlay "15pF" at 4092,-5887 h20 r90; Top Overlay "L Res" at 4585,-5945 h20 r90
SW26: Top Overlay "L Res" at 3835,-2995 h20 r90; Top Overlay "15pF" at 3342,-2937 h20 r90; Top Overlay "WS2812" at 3544,-3007 h20; Top Overlay "1" at 3454,-2850 h20; Top Overlay "LED" at 3558,-2720 h30
SW27: Top Overlay "LED" at 3558,-3470 h30; Top Overlay "1" at 3454,-3600 h20; Top Overlay "WS2812" at 3544,-3757 h20; Top Overlay "15pF" at 3342,-3687 h20 r90; Top Overlay "L Res" at 3835,-3745 h20 r90
SW28: Top Overlay "L Res" at 3835,-4495 h20 r90; Top Overlay "15pF" at 3342,-4437 h20 r90; Top Overlay "WS2812" at 3544,-4507 h20; Top Overlay "1" at 3454,-4350 h20; Top Overlay "LED" at 3558,-4220 h30
SW29: Top Overlay "LED" at 3558,-4970 h30; Top Overlay "1" at 3454,-5100 h20; Top Overlay "WS2812" at 3544,-5257 h20; Top Overlay "15pF" at 3342,-5187 h20 r90; Top Overlay "L Res" at 3835,-5245 h20 r90
SW30: Top Overlay "L Res" at 3085,-2995 h20 r90; Top Overlay "15pF" at 2592,-2937 h20 r90; Top Overlay "WS2812" at 2794,-3007 h20; Top Overlay "1" at 2704,-2850 h20; Top Overlay "LED" at 2808,-2720 h30
SW31: Top Overlay "LED" at 3007,-3542 h30 r90; Top Overlay "1" at 3137,-3646 h20 r90; Top Overlay "WS2812" at 3294,-3556 h20 r90; Top Overlay "15pF" at 3224,-3758 h20 r180; Top Overlay "L Res" at 3282,-3265 h20 r180
SW32: Top Overlay "L Res" at 3282,-4390 h20 r180; Top Overlay "15pF" at 3224,-4883 h20 r180; Top Overlay "WS2812" at 3294,-4681 h20 r90; Top Overlay "1" at 3137,-4771 h20 r90; Top Overlay "LED" at 3007,-4667 h30 r90
SW33: Top Overlay "LED" at 3070.29,-5846.04 h30 r25
SW34: Top Overlay "LED" at 3342,-6083 h30 r180
SW35: Top Overlay "LED" at 2074.29,-5484.04 h30 r25; Top Overlay "1" at 2034.97,-5645.81 h20 r25; Top Overlay "WS2812" at 2182.89,-5750.07 h20 r25; Top Overlay "15pF" at 1970.23,-5771.99 h20 r115; Top Overlay "L Res" at 2441.55,-5616.21 h20 r115
SW36: Top Overlay "L Res" at 2758.55,-6295.21 h20 r115; Top Overlay "15pF" at 2287.23,-6450.99 h20 r115; Top Overlay "WS2812" at 2499.89,-6429.07 h20 r25; Top Overlay "1" at 2351.97,-6324.81 h20 r25; Top Overlay "LED" at 2391.29,-6163.04 h30 r25
SW37: Top Overlay "LED" at 2651.71,-6522.96 h30 r205; Top Overlay "1" at 2691.03,-6361.19 h20 r205; Top Overlay "WS2812" at 2543.11,-6256.93 h20 r205; Top Overlay "15pF" at 2755.77,-6235.01 h20 r295; Top Overlay "L Res" at 2284.45,-6390.79 h20 r295
SW38: Top Overlay "L Res" at 1761.55,-5932.21 h20 r115; Top Overlay "15pF" at 1290.23,-6087.99 h20 r115; Top Overlay "WS2812" at 1502.89,-6066.07 h20 r25; Top Overlay "1" at 1354.97,-5961.81 h20 r25; Top Overlay "LED" at 1394.29,-5800.04 h30 r25
SW39: Top Overlay "LED" at 1711.29,-6480.04 h30 r25; Top Overlay "1" at 1671.97,-6641.81 h20 r25; Top Overlay "WS2812" at 1819.89,-6746.07 h20 r25; Top Overlay "15pF" at 1607.23,-6767.99 h20 r115; Top Overlay "L Res" at 2078.55,-6612.21 h20 r115
SW40: Top Overlay "L Res" at 2395.55,-7292.21 h20 r115; Top Overlay "15pF" at 1924.23,-7447.99 h20 r115; Top Overlay "WS2812" at 2136.89,-7426.07 h20 r25; Top Overlay "1" at 1988.97,-7321.81 h20 r25; Top Overlay "LED" at 2028.29,-7160.04 h30 r25